# Altium PCB PCB2.PcbDoc
Units mil, origin at the board's own origin, x right, y up, seen from the top; angles counter-clockwise.
Board outline 1642.9 x 702.9 mil, 2 copper layers (Top Layer, Bottom Layer); 20 components, 15 nets, 54 pads, 14 vias.
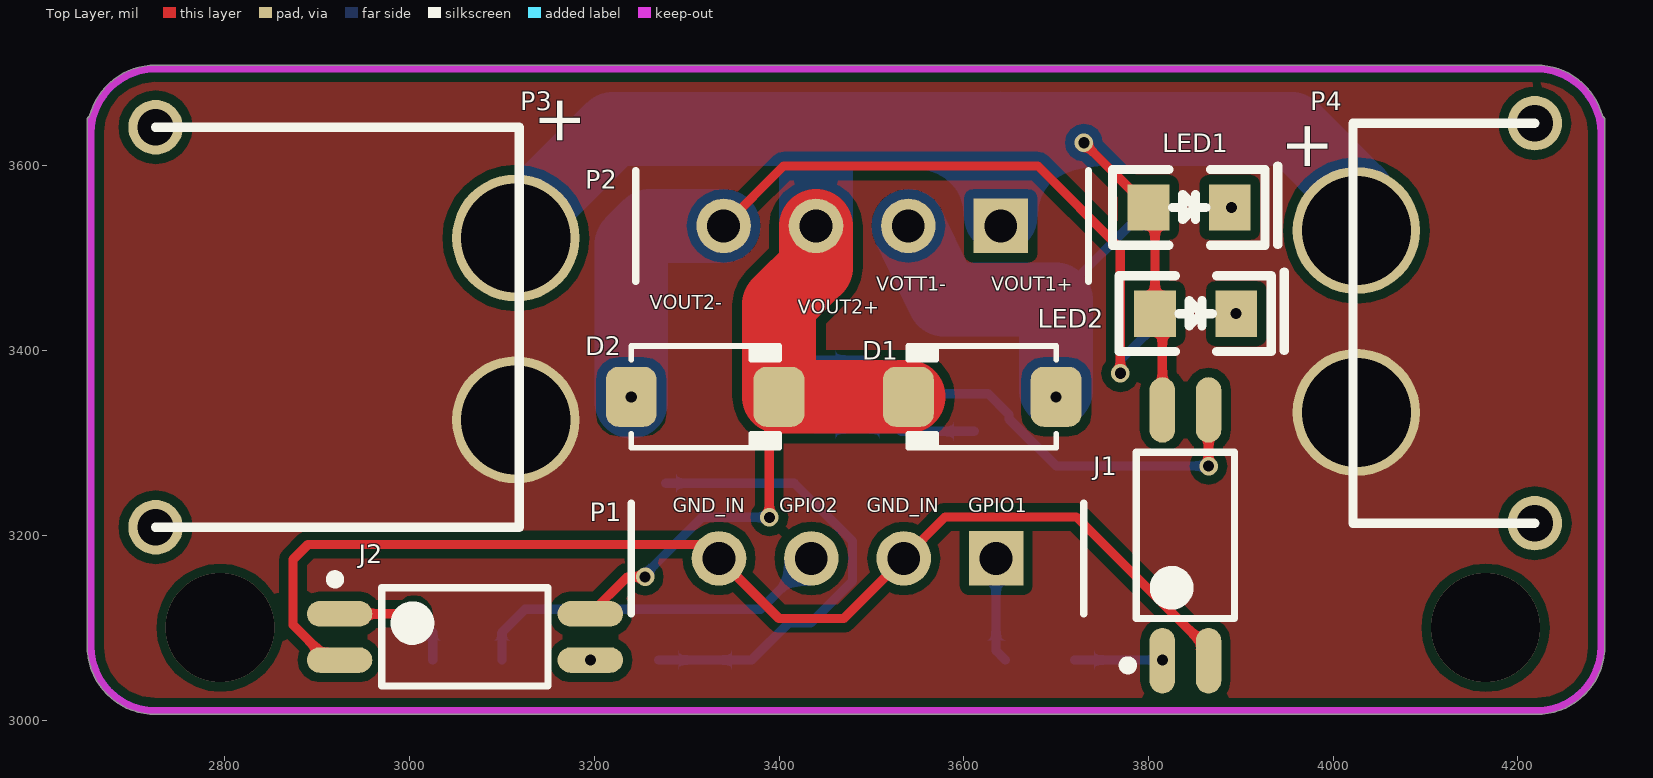
[diagram p0: Top Layer view]
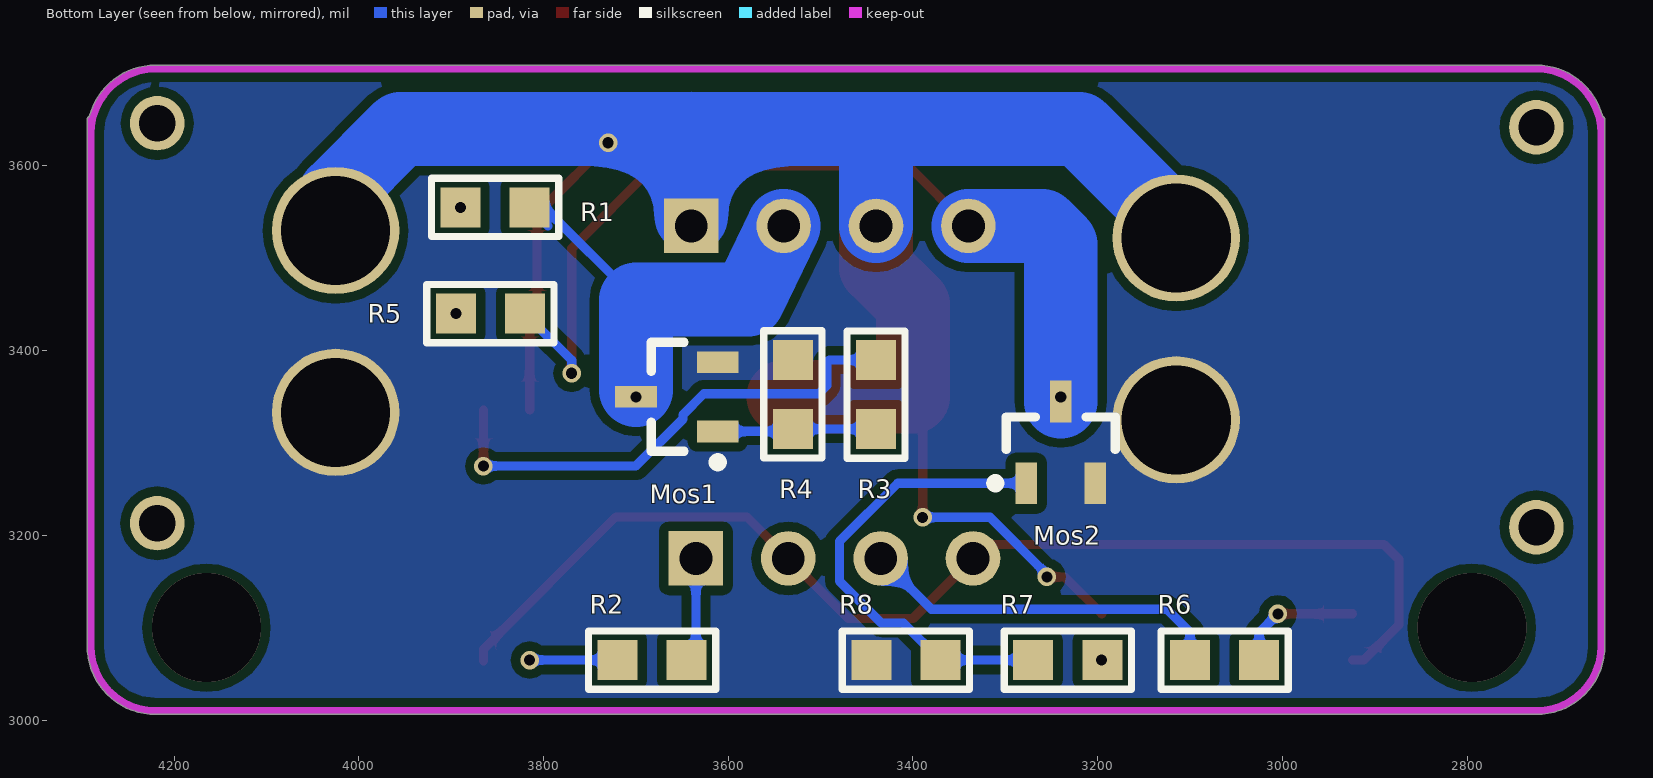
[diagram p1: Bottom Layer view, seen from below]
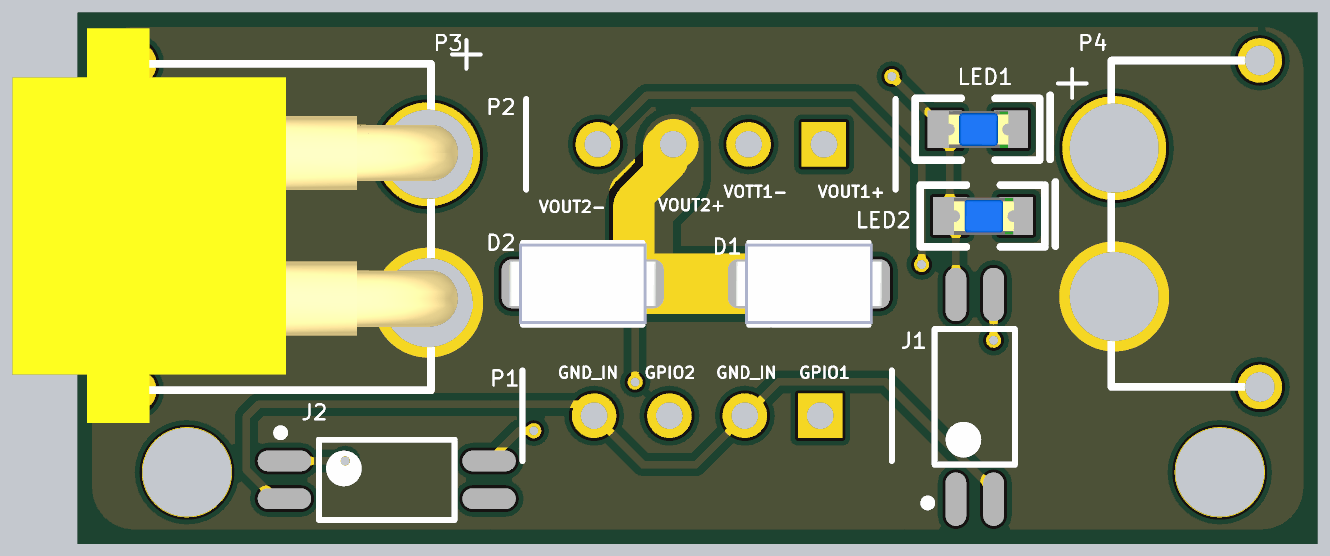
[diagram p2: 3D render of the assembled board from above, using the file's embedded part models]

## Layer stack, top to bottom
Top Solder: solder mask 0.4, Solder Resist, Dk 3.5
Top Layer: signal copper 1.4
Dielectric 1: dielectric 12.6, FR-4, Dk 4.8
Bottom Layer: signal copper 1.4
Bottom Solder: solder mask 0.4, Solder Resist, Dk 3.5

## Board outline
2651.33,3073.53 cw(c2655,3075) 2651.05,3075 2651.05,3650 cw(c2655,3650) 2653.43,3653.63 cw(c2725,3635) 2725,3708.95 4220,3708.95 cw(c4220,3635) 4291.57,3653.63 cw(c4290,3650) 4293.95,3650 4293.95,3075 cw(c4290,3075) 4293.67,3073.53 cw(c4220,3080) 4220,3006.05 2725,3006.05 cw(c2725,3080)

## Design rules (kind name [scope] priority, off if disabled: settings)
Clearance [All] p1: gap=10 ignorepadtopadclearanceinfootprint=FALSE except(0: Arc-Hole Track-Hole SMDPad-Hole THPad-Hole Via-Hole Fill-Hole Poly-Hole Region-Hole Text-Hole)
PolygonConnect [All] p1: connectstyle=Direct reliefconductorwidth=10 reliefentries=4 polygonreliefangle="90 Angle" airgapwidth=10
RoutingVias [All] p1: holewidth=28 width=50 viastyle="Through Hole" minholewidth=28 minwidth=50 maxholewidth=28 maxwidth=50
SolderMaskExpansion [All] p1: expansion=4
Width [All] p1: maxlimit=100 minlimit=10 preferedwidth=10 minimp=50.000000 maximp=50.000000 favimp=50.000000
30 further rules are at their usual default settings.

## Components (designator, comment, footprint, x,y, rotation, side; value= is the part's Value field where it differs from the comment)
D1 "SS34" DO-214AC 3620,3350 r180 top
D2 "SS34" DO-214AC 3320,3350 r0 top
J1 "TLP281-1" TLP281-1 3840,3200 r90 top
J2 "TLP281-1" TLP281-1 3060,3090 r0 top
LED1 "lED" 0805D 3800,3555 r0 top
LED2 "lED" 0805D 3807,3440 r0 top
Mos1 "MOSFET N" Nmos_SOT23 3655.71,3350 r0 bottom
Mos2 "MOSFET N" Nmos_SOT23 3240,3300.71 r90 bottom
P1 "XHpin4" XH-2.54pin4 3635,3175 r180 top
P2 "XHpin4" XH-2.54pin4 3640,3535 r180 top
P3 "Connector" XT30_PW_M 2835,3271.85 r90 top
P4 "Connector" XT30_PW_F 4150,3423.15 r270 top
R1 "Res1" RES-0603 3815,3555 r180 bottom value=10K
R2 "Res1" RES-0603 3645,3065 r180 bottom value=330
R3 "Res1" RES-0603 3440,3389.8 r90 bottom value=10K
R4 "Res1" RES-0603 3530,3315.2 r270 bottom value=10K
R5 "Res1" RES-0603 3820,3440 r180 bottom value=10K
R6 "Res1" RES-0603 3100,3065 r0 bottom value=330
R7 "Res1" RES-0603 3195,3065 r180 bottom value=10K
R8 "Res1" RES-0603 3370.2,3065 r180 bottom value=10K

## Footprints (in the part's own frame and the unit in brackets; to place one, negate y for a bottom-side part, rotate by r counter-clockwise, add the part's x,y. Pads: shape width x height; smd on the part's side, far side on the other; paste and mask are expansions set on the pad)
0805D [mil]
  rect 45x50 smd: A(0,0) K(88,0)
  silkscreen extent -39,-41 140,45, body extent 5,-25 85,24, height 43
DO-214AC [mil] "SMA"
  rrect50% 55x65 smd: 1(-80,0) 2(80,0)
  silkscreen extent -80,-55 80,55, body extent -98,-53 98,53, height 85
Nmos_SOT23 [mm]
  rect 1.15x0.6 smd: D(1.125,0) G(-1.125,0.95) S(-1.125,-0.95)
  silkscreen extent -1.25,-1.5 0.7,1.92, body extent -0.7,-1.5 0.7,1.5, height 1.14
RES-0603 [mm]
  rect 1.1x1.1 smd: 1(0,0) 2(-1.9,0)
  silkscreen extent -2.7,-0.8 0.8,0.8, body extent -1.8,-0.47 -0.1,0.48, height 0.6
TLP281-1 [mm] "SOP, 4-Leads, Body 2.7x4.5mm (max), Pitch 1.27mm, IPC Medium Density"
  oval 1.8x0.7 smd: 1(-3.448,0.635) 2(-3.448,-0.635) 3(3.448,-0.635) 4(3.448,0.635)
  silkscreen extent -3.7,-1.35 2.29,1.71, body extent -2.76,-1.35 2.79,1.35, height 3.5
XH-2.54pin4 [mm]
  rect 1.5x1.5 hole 0.9: 1(0,0)
  round 1.5 hole 0.9: 2(2.54,0) 3(5.08,0) 4(7.62,0)
  silkscreen extent -2.41,-1.52 10.03,1.52
XT30_PW_F [mm]
  round 1.5 hole 1: 0(-5.666,1.731) 0(5.334,1.731)
  round 3.5 hole 3: 1(-2.714,-3.175) 2(2.286,-3.175)
  silkscreen extent -5.67,-3.27 5.33,1.73
XT30_PW_M [mm]
  round 1.5 hole 1: 0(-1.602,2.794) 0(9.398,2.794)
  round 3.5 hole 3: 1(1.35,-7.112) 2(6.35,-7.112)
  silkscreen extent -1.6,-7.21 9.4,2.79, body extent -2.71,-8.12 10.59,6.89, height 5

## Part data
D1 D2: "Diode"
J1 J2: "光耦"
LED1 LED2: library part 00-D-LED, "LED"
Mos1 Mos2: "MOS SOT23"
P1 P2: library part XH4, "XH-2.54PIN4"
P3 P4: library part 2P
R1 R2 R3 R4 R5 R6 R7 R8: "Resistor", LatestRevisionDate=17-Jul-2002, LatestRevisionNote="Re-released for DXP Platform.", PackageReference=AXIAL-0.3, Published=8-Jun-2000, Publisher="Altium Limited"

## Via types
v1: diameter 20, hole 12, Top Layer to Bottom Layer, 12 vias
v2: diameter 118, hole 118, Top Layer to Bottom Layer, 2 vias

## Nets (pads, with @x,y where several pads share a name; then routed paths per layer and width w, separated by ;. In a path a pad name is that pad's centre, name@x,y a point inside that pad or via, vN(x,y) a via of type N, cw(c..) or ccw(c..) an arc to the next point about the centre after c; other vN are vias at no path point)
GND: Mos1.S Mos2.S P3.1 P4.2 R4.2 R8.2
GND_IN1: J1.2 J2.2 P1.2 P1.4 | length 1285.3
  Top Layer w10: J2.2 2911.9,3065 2873.82,3103.08 2873.82,3173.82 2890,3190 3320,3190 P1.4 3400,3110 3470,3110 P1.2 3580,3220 3721.61,3220 3865,3076.61 J1.2
GPIO1: P1.1 R2.1 | length 114.1
  Bottom Layer w10: P1.1 3635,3075 R2.1
GPIO2: P1.3 R6.1 | length 398.1
  Bottom Layer w10: R6.1 3100,3095 3125,3120 3380,3120 P1.3
NetJ1_1: J1.1 R2.2 | length 95.2
  Bottom Layer w10: R2.2 v1(3815,3065)
NetJ1_3: J1.3 R3.1 | length 550.5
  Top Layer w10: v1(3865,3275) J1.3
  Bottom Layer w10: R3.1 3490.38,3389.8 3493.35,3386.83 3493.35,3362.13 3502.13,3353.35 3626.33,3353.35 3649.05,3330.62 3649.05,3325.95 3700,3275 v1(3865,3275)
NetJ2_1: J2.1 R6.2 | length 134.1
  Top Layer w10: J2.1 v1@3000,3115
  Bottom Layer w10: v1(3005,3115) 3025.2,3094.8 R6.2
NetJ2_3: J2.3 R7.1
  other v1: 3195.75,3065
NetLED1_K: LED1.K R1.2
  other v1: 3889.8,3555
NetLED2_K: LED2.K R5.2
  other v1: 3894.8,3440
NetMos1_G: Mos1.G R3.2 R4.1 | length 172.4
  Bottom Layer w10: R3.2 3529.8,3315 3532.21,3312.6 Mos1.G
NetMos2_G: Mos2.G R7.2 R8.1 | length 516.3
  Bottom Layer w10: R7.2 R8.1 3410.2,3105 3434.06,3105 3479.53,3150.47 3479.53,3193.44 3416.56,3256.42 Mos2.G
VCC: D1.2 D2.2 J1.4 J2.4 LED1.A LED2.A P2.1 P2.3 P3.2 P4.1 | length 2234.8
  Top Layer w10: J2.4 3235.75,3155 v1(3255,3155) ; v1(3389.53,3219.53) 3389.53,3339.53 D2.2 ; v1(3730,3625) LED1.A 3807,3548 LED2.A 3815,3432 J1.4
  Top Layer w80: P2.3 3440,3490 3400,3450 D2.2 D1.2
  Bottom Layer w10: v1(3255,3155) 3255,3157.97 3316.56,3219.53 v1(3389.53,3219.53)
  Bottom Layer w80: P3.2 3115,3535 3220,3640 3640,3640 ; P2.3 3440,3600 ; P2.1@3640,3545.47 3640,3640 ; P4.1 4025,3570 3955,3640 3640,3640
Vout1-: D1.1 Mos1.D P2.2 R1.1 | length 492.6
  Bottom Layer w10: 3699.53,3455.47 3799.06,3555 R1.1 R1.1@3795,3535
  Bottom Layer w80: P2.2 3578.55,3455.47 3699.53,3455.47 3700,3455 Mos1.D@3700,3357.46
  other v1: 3700,3350
Vout2-: D2.1 Mos2.D P2.4 R5.1 | length 992.2
  Top Layer w10: P2.4 3405,3600 3680,3600 3769.5,3510.5 v1(3769.5,3375.5)
  Bottom Layer w10: v1(3769.5,3375.5) 3769.5,3389.5 R5.1
  Bottom Layer w80: Mos2.D v1(3240,3350) 3240,3515 3260,3535 P2.4
pads on no net: P3.0 P4.0
copper on no net:
  other v2: 2795,3100 4165,3100

## Polygon pours and split planes (outlines as drawn)
GND on Bottom Layer "GND_L02_P014" (solid, remove dead copper, pour order 14): 2645,3750 2655,3760 4320,3760 4320,2910 4305,2895 4220,2980 2585,2980
GND on Top Layer "GND_L01_P016" (solid, remove dead copper, pour order 16): 2595,3735 4370,3735 4410,3695 4345,3630 4345,2970 2570,2970 2555,2985

## Keep-outs
Keep-Out Layer:
  lines w7.87: 2655,3075 2655,3650 ; 2655,3080 ccw(c2725,3080) 2725,3010 4220,3010 ccw(c4220,3080) 4290,3080 ; 2655,3635 cw(c2725,3635) 2725,3705 4220,3705 cw(c4220,3635) 4290,3635 ; 4290,3075 4290,3650

## Silkscreen, mask and mechanical layers (free items; w line width, h text height)
Top Overlay:
  text "VOTT1-" at 3505,3465 h15
  text "VOUT1+" at 3630,3465 h15
  text "VOUT2-" at 3260,3445 h15
  text "VOUT2+" at 3420,3440 h15
  text "GND_IN" at 3285,3225 h15
  text "GPIO2" at 3400,3225 h15
  text "GND_IN" at 3495,3225 h15
  text "GPIO1" at 3605,3225 h15
Top Solder:
  lines w60: 3385,3350 3385,3470 3430,3515 3430,3530
  lines w80: 3385,3350 3535,3350
Bottom Solder:
  lines w80: 3135,3565 3150,3565 3230,3645 3415,3645 3440,3620 3440,3570 3440,3535 ; 3240,3350 3240,3500 3275,3535 3340,3535 ; 3395,3645 3585,3645 ; 3535,3510 3535,3545 ; 3555,3485 3585,3455 3705,3455 3705,3365 ; 3555,3645 3955,3645 4030,3570 4030,3535 ; 3640,3550 3640,3620

## Text inside footprints (layer, text, board x,y; h text height)
P3: Top Overlay "+" at 3185,3620 h50 r90
P4: Top Overlay "+" at 3950,3650 h50 r270